# Altium PCB PCB2.PcbDoc (part 2 of 2)
Units mm, origin at the board's own origin, x right, y up, seen from the top; angles counter-clockwise.
Board outline 152.4 x 101.6 mm, 2 copper layers (Top Layer, Bottom Layer); 137 components, 157 nets, 564 pads, 402 vias.
Unrouted connection lines stored in the file: 6.
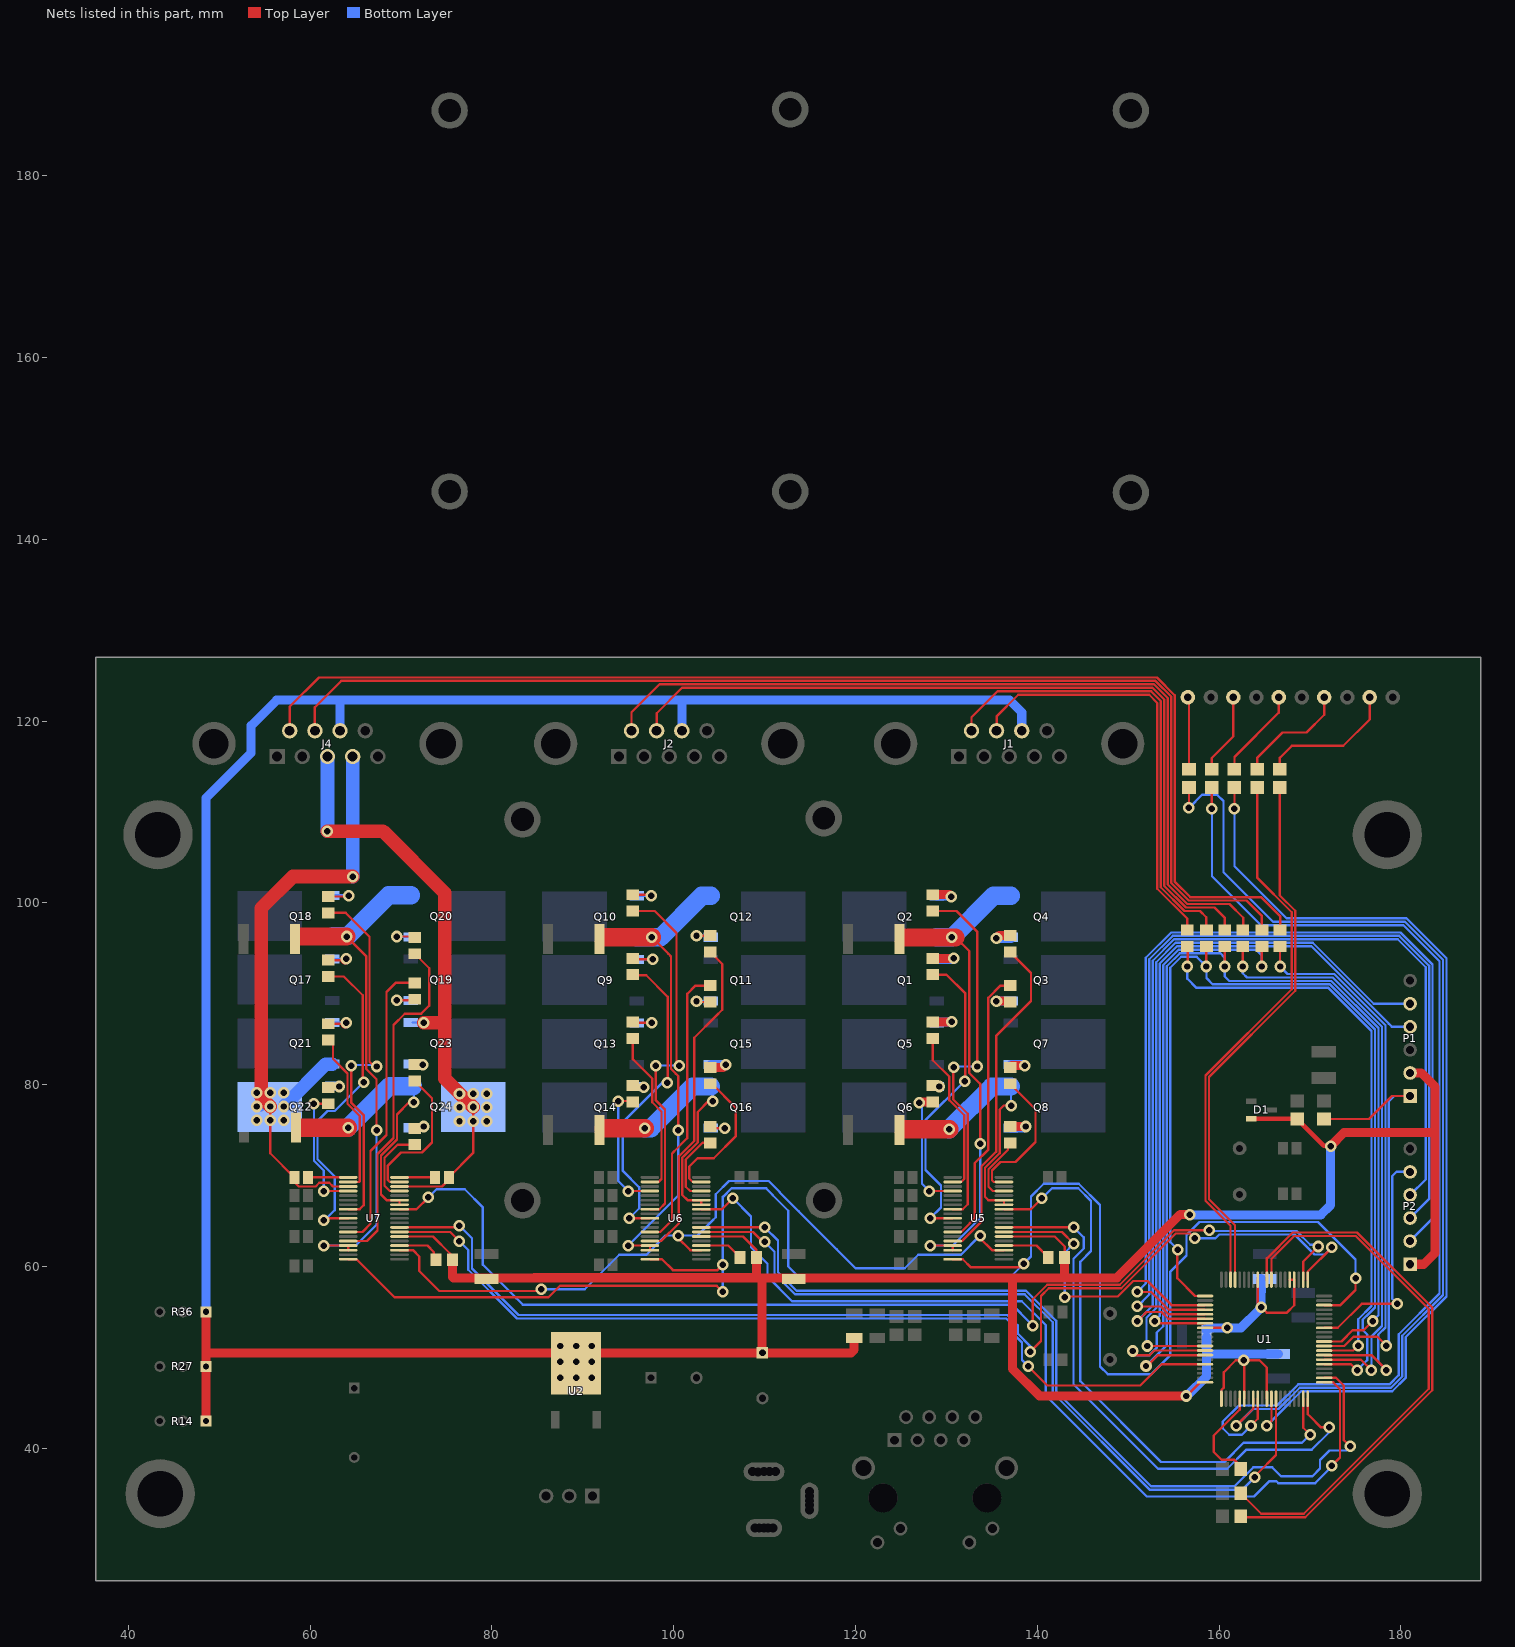
[diagram p2: the nets of this part, all layers, seen from the top]

## Via types
v1: diameter 1.27, hole 0.711, Top Layer to Bottom Layer, 402 vias

## Nets (pads, with @x,y where several pads share a name; then routed paths per layer and width w, separated by ;. In a path a pad name is that pad's centre, name@x,y a point inside that pad or via, vN(x,y) a via of type N, cw(c..) or ccw(c..) an arc to the next point about the centre after c; other vN are vias at no path point) (continued)
NetC41_1: C41.1 J4.4 Q21.3 Q22.4 U7.3 | length 70.6
  Top Layer w0.254: v1@55.6,77.4 55.6,72.45 C41.1@58.25,69.8 58.25,69.3 58.75,68.8 60.6,68.8 61,69.2 62.1,69.2 62.5,68.8 U7.3@64.175,68.8
  Top Layer w1.5: v1(55.6,77.6) 54.6,78.6 54.6,91.9 54.6,99.4 58.1,102.9 v1(64.7,102.9)
  Bottom Layer w1: Q22.4@54.575,77.55 Q22.4@55.075,78.05 ; Q22.4@57.25,77.55 Q22.4@57.25,77.8
  Bottom Layer w1.5: Q22.4@57.25,77.8 61.715,82.265 Q21.3@62.425,82.265 ; v1@64.67,102.9 J4.4@64.67,116.1
  other v1: 54.1,76.1 55.6,76.1 57.1,76.1 54.1,77.6 55.6,77.6 57.1,77.6 54.1,79.1 55.6,79.1 57.1,79.1
NetC41_2: C41.2 U7.1 | length 4.4
  Top Layer w0.254: C41.2@59.75,69.8 U7.1@64.175,69.8
NetC42_1: C42.1 J4.3 Q23.3 Q24.4 U7.36 | length 69.3
  Top Layer w0.254: U7.36@69.825,68.8 74.5,68.8 C42.1@75.25,69.55 ; C42.1@75.25,69.8 77.925,72.475 v1@77.925,77.625
  Top Layer w1.5: v1(61.9,107.9) 68,107.9 74.8,101.1 74.8,84.5 ; v1(72.5,86.8) 74.8,86.8 74.8,80.675 v1(77.925,77.55)
  Bottom Layer w0.254: Q23.3@71.25,86.835 v1@72.5,86.835
  Bottom Layer w1.5: v1(61.9,107.9) J4.3@61.9,116.1
  other v1: 76.425,76 77.925,76 79.425,76 76.425,77.5 77.925,77.5 79.425,77.5 76.425,79 77.925,79 79.425,79
NetC42_2: C42.2 U7.38 | length 3.9
  Top Layer w0.254: U7.38@69.825,69.8 C42.2@73.75,69.8
NetD2_1: D2.1 R38.2 | length 7.8
  Top Layer w0.254: R38.2@156.675,114.7 D2.1@156.675,122.505
NetD3_1: D3.1 R39.2 | length 8.9
  Top Layer w0.254: R39.2@159.175,114.7 159.175,115.925 161.555,118.305 D3.1@161.555,122.625
NetD4_1: D4.1 R40.2 | length 9.9
  Top Layer w0.254: R40.2@161.675,114.7 161.675,116.05 166.555,120.93 D4.1@166.555,122.625
NetD5_1: D5.1 R41.2 | length 12.5
  Top Layer w0.254: R41.2@164.175,114.7 164.175,115.95 166.975,118.75 169.6,118.75 171.555,120.705 D5.1@171.555,122.625
NetD6_1: D6.1 R42.2 | length 15.3
  Top Layer w0.254: R42.2@166.675,114.7 166.675,115.95 168,117.275 173.65,117.275 176.555,120.18 D6.1@176.555,122.625
NetJ1_6: J1.6 R1.1 | length 52.3
  Top Layer w0.254: J1.6@132.745,118.94 132.745,120.42 135.606,123.281 152.514,123.281 153.576,122.219 153.576,101.713 156.178,99.111 157.889,99.111 158.574,98.426 R1.1@158.574,96.9
NetJ1_7: J1.7 R2.1 | length 46.5
  Top Layer w0.254: J1.7@135.515,118.94 135.515,120.515 137.9,122.9 152.295,122.9 153.195,122 153.195,101.555 156.5,98.25 R2.1@156.5,97.441
NetJ2_6: J2.6 R3.1 | length 94.6
  Top Layer w0.254: J2.6@95.345,118.94 95.345,120.97 98.418,124.043 152.829,124.043 154.338,122.535 154.338,102.029 156.493,99.873 161.127,99.873 162.638,98.362 R3.1@162.638,97
NetJ2_7: J2.7 R4.1 | length 89.4
  Top Layer w0.254: J2.7@98.115,118.94 98.115,120.865 100.912,123.662 152.672,123.662 153.957,122.377 153.957,101.871 156.336,99.492 159.5,99.492 160.6,98.392 R4.1@160.6,97
NetJ4_6: J4.6 R5.1 | length 137.4
  Top Layer w0.254: J4.6@57.745,118.94 57.745,121.595 60.955,124.805 153.145,124.805 155.1,122.85 155.1,102.345 156.809,100.635 164.615,100.635 166.702,98.548 R5.1@166.702,97
NetJ4_7: J4.7 R6.1 | length 132.2
  Top Layer w0.254: J4.7@60.515,118.94 60.515,121.515 63.424,124.424 152.987,124.424 154.719,122.693 154.719,102.187 156.651,100.254 162.996,100.254 164.7,98.55 R6.1@164.7,97
NetP1_1: P1.1 R8.1 U1.9 | length 48
  Top Layer w0.254: R8.1@171.528,76.216 176.491,76.216 179.025,78.75 P1.1@181,78.75 ; U1.9@171.55,51.25 173.75,51.25 174.775,52.275 176.1,52.275 177.425,52.275 178.032,51.668 178.4,51.668 v1(178.4,51.3)
  Bottom Layer w0.254: v1(178.4,51.3) 178.711,51.611 178.669,51.653 178.669,56.292 178.669,70.108 178.669,78.169 179.25,78.75 P1.1@181,78.75
NetP1_4: P1.4 U1.47 | length 77.5
  Top Layer w0.254: v1@153.15,54 v1(152.9,54) 153.15,53.75 U1.47@158.45,53.75
  Bottom Layer w0.254: v1(152.9,54) 153.457,54.557 153.457,93.323 155.36,95.226 170.143,95.226 178.649,86.72 178.999,86.37 P1.4@181,86.37
NetP1_5: P1.5 U1.52 | length 80.7
  Top Layer w0.254: v1(152.075,51.25) U1.52@158.45,51.25
  Bottom Layer w0.254: v1(152.075,51.25) 152,51.325 152,54.357 153.076,55.433 153.076,93.481 155.202,95.607 170.301,95.607 176.998,88.91 P1.5@181,88.91
NetP2_2: P2.2 U1.44 | length 111
  Top Layer w0.254: v1(151,57.2) 152.525,57.2 154.475,55.25 U1.44@158.45,55.25
  Bottom Layer w0.254: v1(151,57.2) 151.933,58.133 151.933,93.955 154.728,96.75 179.959,96.75 183.476,93.233 183.476,65.266 P2.2@181,62.79
NetP2_3: P2.3 U1.45 | length 108.4
  Top Layer w0.254: v1(151,55.6) 153.586,55.6 154.436,54.75 U1.45@158.45,54.75
  Bottom Layer w0.254: v1(151,55.6) 152.314,56.914 152.314,93.797 154.886,96.369 179.801,96.369 183.095,93.075 183.095,67.425 P2.3@181,65.33
NetP2_4: P2.4 U1.46 | length 107.6
  Top Layer w0.254: v1(151,54) 151,54.5 151.425,54.075 151.425,54.425 152,55 153.647,55 154.397,54.25 U1.46@158.45,54.25
  Bottom Layer w0.254: v1@150.95,54.05 v1@151.154,54.05 ; v1(151,54) 152.695,55.695 152.695,93.639 155.044,95.988 179.643,95.988 182.714,92.917 182.714,69.584 P2.4@181,67.87
NetP2_5: P2.5 U1.13 | length 25.6
  Top Layer w0.254: U1.13@171.55,53.25 173.05,53.25 175.7,55.9 v1(179.6,55.9)
  Bottom Layer w0.254: v1(179.6,55.9) 179.05,56.45 179.05,69.95 179.51,70.41 P2.5@181,70.41
NetQ1_1: Q1.1 R15.1 | length 3.8
  Top Layer w1: R15.1@128.5,93.9 v1@130.5,93.9
  Bottom Layer w1: Q1.1@128.925,93.785 v1@130.685,93.785
  other v1: 130.8,93.9
NetQ2_1: Q2.1 R16.1 | length 3.3
  Top Layer w1: R16.1@128.5,100.9 v1@130.3,100.9
  Bottom Layer w1: Q2.1@128.925,100.785 v1@130.415,100.785
  other v1: 130.5,100.7
NetQ2_3: Q2.3 Q4.3 R51.1 U5.16 U5.17 | length 57.2
  Top Layer w0.254: v1(128.2,62.3) U5.16@130.675,62.3 U5.17@130.675,61.8 ; v1@130.992,96.2 132.5,94.692 132.5,81.3 133.7,80.1 v1(133.7,73.5)
  Top Layer w2: 125.55,96.2 v1@130.992,96.2
  Bottom Layer w0.254: v1(128.2,62.3) 130.7,62.3 133.7,65.3 v1(133.7,73.5)
  Bottom Layer w2: Q2.3@128.925,96.215 130.615,96.215 135.185,100.785 Q4.3@137.075,100.785
  other v1: 130.6,96.2
NetQ3_1: Q3.1 R22.1 | length 3
  Top Layer w1: v1(135.5,89.2) R22.1@136.9,89.2
  Bottom Layer w1: v1@135.515,89.215 Q3.1@137.075,89.215
NetQ4_1: Q4.1 R23.1 | length 2.8
  Top Layer w1: v1@135.8,96.4 R23.1@137,96.4
  Bottom Layer w1: v1(135.5,96.1) Q4.1@137.075,96.1
NetQ5_1: Q5.1 R24.1 | length 3.7
  Top Layer w1: R24.1@128.5,86.9 v1(130.6,86.9)
  Bottom Layer w1: Q5.1@129.04,86.9 v1(130.6,86.9)
NetQ6_1: Q6.1 R25.1 | length 0.9
  Top Layer w1: R25.1@128.6,79.8 v1(129.2,79.8)
  Bottom Layer w1: Q6.1@128.925,79.785 Q6.1@129.2,79.785
NetQ6_3: Q6.3 Q8.3 R52.1 U5.32 U5.33 | length 30.1
  Top Layer w0.254: U5.32@136.325,66.8 U5.33@136.325,67.3 134.6,67.3 134.24,67.66 134.24,68.686 134.24,70.862 135.843,72.465 135.843,77.243 136.3,77.7 v1(137.1,77.7)
  Top Layer w2: 125.4,75.1 v1(130.3,75.1)
  Bottom Layer w0.254: v1(137.1,77.7) Q8.3@137.1,79.76
  Bottom Layer w2: v1(130.3,75.1) 134.985,79.785 Q8.3@137.075,79.785
NetQ7_1: Q7.1 R26.1 | length 2.8
  Top Layer w1: R26.1@137.2,82.1 v1(138.6,82.1)
  Bottom Layer w1: Q7.1@137.075,82.215 v1@138.485,82.215
NetQ8_1: Q8.1 R28.1 | length 3.1
  Top Layer w1: R28.1@137,75.4 v1(138.7,75.4)
  Bottom Layer w1: Q8.1@137.075,75.215 v1@138.515,75.215
NetQ9_1: Q9.1 R29.1 | length 3.9
  Top Layer w0.254: R29.1@95.6,93.8 v1(97.7,93.8)
  Bottom Layer w0.254: Q9.1@95.925,93.785 v1@97.685,93.785
NetQ10_1: Q10.1 R30.1 | length 3.5
  Top Layer w0.254: R30.1@95.5,100.9 v1@97.4,100.9
  Bottom Layer w0.254: Q10.1@95.94,100.8 v1(97.5,100.8)
NetQ10_3: Q10.3 Q12.3 R53.1 U6.16 U6.17 | length 55.8
  Top Layer w0.254: v1(95,62.3) U6.16@97.375,62.3 U6.17@97.375,61.8 ; v1@97.6,96.104 97.711,96.104 v1(97.6,96.215) 98.1,95.715 99.396,94.419 99.7,94.115 99.7,81.743 100.232,81.211 100.5,80.943 v1(100.5,75)
  Top Layer w2: 92.4,96.215 v1(97.6,96.215)
  Bottom Layer w0.254: v1(95,62.3) 100.5,67.8 v1(100.5,75)
  Bottom Layer w2: Q10.3@95.925,96.215 98.515,96.215 103.085,100.785 Q12.3@104.075,100.785
NetQ11_1: Q11.1 R31.1 | length 3
  Top Layer w0.254: v1@102.6,89.1 R31.1@104,89.1
  Bottom Layer w0.254: v1@102.515,89.215 Q11.1@104.075,89.215
  other v1: 102.5,89.2
NetQ12_1: Q12.1 R32.1 | length 2.9
  Top Layer w0.254: v1(102.5,96.4) R32.1@104,96.4
  Bottom Layer w0.254: v1(102.5,96.4) Q12.1@103.89,96.4
NetQ13_1: Q13.1 R33.1 | length 3.7
  Top Layer w0.254: R33.1@95.6,86.8 v1(97.6,86.8)
  Bottom Layer w0.254: Q13.1@95.925,86.785 v1@97.585,86.785
NetQ14_1: Q14.1 R34.1 | length 1.7
  Top Layer w0.254: R34.1@95.7,79.7 v1(96.7,79.7)
  Bottom Layer w0.254: Q14.1@96.01,79.7 v1(96.7,79.7)
NetQ14_3: Q14.3 Q16.3 R54.1 U6.32 U6.33 | length 30.2
  Top Layer w0.254: U6.32@103.025,66.8 U6.33@103.025,67.3 101.5,67.3 100.94,67.86 100.94,68.621 100.94,71.958 101.081,72.099 102.632,73.65 102.632,77 103.832,78.2 v1(104.3,78.2)
  Top Layer w2: R54.1@92.3,75.2 v1(96.8,75.2)
  Bottom Layer w0.254: Q16.3@104.075,79.785 104.3,79.56 v1(104.3,78.2)
  Bottom Layer w2: v1@96.8,75.215 97.485,75.215 102.055,79.785 Q16.3@104.075,79.785
NetQ15_1: Q15.1 R35.1 | length 3
  Top Layer w1: R35.1@104,81.9 v1@105.4,81.9
  Bottom Layer w1: Q15.1@104.075,82.215 v1@105.685,82.215
  other v1: 105.7,82.2
NetQ16_1: Q16.1 R37.1 | length 2.9
  Top Layer w0.254: R37.1@104.2,75.2 v1(105.6,75.2)
  Bottom Layer w0.254: Q16.1@104.09,75.2 v1(105.6,75.2)
NetQ17_1: Q17.1 R43.1 | length 3.6
  Top Layer w0.254: R43.1@62,93.7 v1@63.83,93.7
  Top Layer w1: v1@63.83,93.7 v1(63.965,93.835)
  Bottom Layer w0.254: Q17.1@62.425,93.835 v1(63.965,93.835)
NetQ18_1: Q18.1 R44.1 | length 3.9
  Top Layer w0.254: R44.1@62,100.7 v1@64.15,100.7
  Bottom Layer w0.254: Q18.1@62.425,100.835 v1@64.215,100.835
  other v1: 64.25,100.8
NetQ18_3: Q18.3 Q20.3 R55.1 U7.16 U7.17 | length 58.8
  Top Layer w0.254: v1(61.5,62.3) U7.16@64.175,62.3 U7.17@64.175,61.8 ; v1(64,96.3) 66.151,94.149 66.151,81.749 67.3,80.6 v1@67.3,74.976
  Top Layer w2: R55.1@58.8,96.3 v1(64,96.3)
  Bottom Layer w0.254: v1(61.5,62.3) 65,62.3 67.3,64.6 v1(67.3,75)
  Bottom Layer w1: Q18.3@62.425,96.265 Q18.3@62.512,96.352
  Bottom Layer w2: Q18.3@62.512,96.352 63.802,96.352 64.152,96.352 68.635,100.835 Q20.3@71.075,100.835
NetQ19_1: Q19.1 R45.1 | length 3.4
  Top Layer w0.254: v1(69.5,89.3) R45.1@71.4,89.3
  Top Layer w1: v1@69.5,89.296 v1(69.5,89.3) v1@69.5,89.296
  Bottom Layer w0.254: v1@69.535,89.265 Q19.1@71.075,89.265
NetQ20_1: Q20.1 R46.1 | length 3
  Top Layer w0.254: v1(69.5,96.3) R46.1@70.9,96.3
  Bottom Layer w0.254: v1@69.5,96.265 Q20.1@71.075,96.265
  Bottom Layer w1: v1@69.5,96.265 v1(69.5,96.3)
NetQ21_1: Q21.1 R47.1 | length 3.6
  Top Layer w0.254: R47.1@62,86.7 v1@63.83,86.7
  Top Layer w1: v1@63.83,86.7 v1(63.965,86.835)
  Bottom Layer w0.254: Q21.1@62.425,86.835 v1(63.965,86.835)
NetQ22_1: Q22.1 R48.1 | length 1.2
  Top Layer w0.254: R48.1@61.7,79.8 R48.1@62.18,79.8
  Bottom Layer w0.254: Q22.1@61.7,79.8 Q22.1@62.39,79.8
  other v1: 63.2,79.8
NetQ22_3: Q22.3 Q24.3 R56.1 U7.32 U7.33 | length 32.2
  Top Layer w0.254: U7.32@69.825,66.8 U7.33@69.825,67.3 68.4,67.3 67.784,67.916 67.784,72.218 69.543,73.977 69.543,76.727 70.9,78.084 v1(71.416,78.084)
  Top Layer w2: R56.1@58.9,75.265 v1(64.165,75.265)
  Bottom Layer w0.254: v1(71.416,78.084) Q24.3@71.416,79.494
  Bottom Layer w1.5: Q22.3@62.425,75.265 v1(64.165,75.265)
  Bottom Layer w2: v1(64.165,75.265) 68.735,79.835 Q24.3@71.3,79.835
NetQ23_1: Q23.1 R49.1 | length 2.3
  Top Layer w0.254: R49.1@71.435,82.265 71.435,82.25 71.485,82.2 v1(72.4,82.2)
  Bottom Layer w0.254: Q23.1@71.095,82.2 v1(72.4,82.2)
NetQ24_1: Q24.1 R50.1 | length 1.3
  Bottom Layer w0.254: Q24.1@71.155,75.4 v1(72.5,75.4)
NetR9_1: R9.1 U1.30 | length 61.1
  Top Layer w0.254: R9.1@162.368,32.512 162.461,32.419 169.458,32.419 183.432,46.393 183.432,55.48 175.174,63.738 168.099,63.738 165.25,60.889 U1.30@165.25,58.55
NetR10_1: R10.1 U1.29 | length 60.1
  Top Layer w0.254: R10.1@162.368,35.052 164.62,32.8 169.3,32.8 183.051,46.551 183.051,55.323 175.017,63.357 168.257,63.357 165.75,60.85 U1.29@165.75,58.55
NetR11_1: R11.1 U5.23 | length 5.4
  Top Layer w0.254: U5.23@136.325,62.3 139.9,62.3 R11.1@141.2,61
NetR12_1: R12.1 U6.23 | length 4.8
  Top Layer w0.254: U6.23@103.025,62.3 106,62.3 R12.1@107.3,61
NetR13_1: R13.1 U7.23 | length 5.1
  Top Layer w0.254: U7.23@69.825,62.3 72.9,62.3 73.6,61.6 R13.1@73.6,60.55
NetR15_2: R15.2 U5.10 | length 34.7
  Top Layer w0.254: v1(128.2,65.3) U5.10@130.675,65.3 ; R15.2@128.5,92.1 130,92.1 132.081,90.019 132.081,80.481 v1(132,80.4)
  Bottom Layer w0.254: v1(128.2,65.3) 129.4,66.5 129.4,68.9 127.7,70.6 127.7,76.1 v1(132,80.4)
NetR16_2: R16.2 U5.8 | length 41
  Top Layer w0.254: R16.2@128.5,99.1 131.1,99.1 133.4,96.8 v1(133.4,82) ; U5.8@130.675,66.3 131.8,66.3 132.335,66.835 132.335,69.475 132.335,76.804 130.73,78.409 130.73,81.83 v1(130.8,81.9)
  Bottom Layer w0.254: v1(130.8,81.9) 130.8,81.934 130.866,82 v1(133.4,82)
NetR21_2: R21.2 U1.65 | length 10.4
  Top Layer w0.254: R21.2@162.225,38.175 161.975,38.425 161.677,38.723 160.277,38.723 159.411,39.589 159.411,41.405 162.25,44.244 U1.65@162.25,45.45
NetR22_2: R22.2 U5.13 | length 30.9
  Top Layer w0.254: U5.13@130.675,63.8 131.621,63.8 131.954,64.133 133.097,65.276 133.097,66.519 133.097,69.159 133.097,71.36 134.611,72.874 134.611,88.832 134.611,89.568 135.943,90.9 R22.2@137,90.9
NetR23_2: R23.2 U5.15 | length 36.9
  Top Layer w0.254: U5.15@130.675,62.8 131.699,62.8 133.859,64.96 133.859,71.02 135.462,72.623 135.462,85.362 139.3,89.2 139.3,92.3 R23.2@137,94.6
NetR24_2: R24.2 U5.2 | length 18.3
  Top Layer w0.254: R24.2@128.5,85.1 128.5,82.7 130.3,80.9 130.3,78.3 131.954,76.646 131.954,69.633 131.621,69.3 U5.2@130.675,69.3
NetR25_2: R25.2 U5.4 | length 14.1
  Top Layer w0.254: v1(128.1,68.3) U5.4@130.675,68.3
  Top Layer w1: v1@127.1,78.1 R25.2@128.5,78.1
  Bottom Layer w0.254: v1(127,78) 127.3,77.7 127.3,69.1 v1(128.1,68.3)
NetR26_2: R26.2 U5.37 | length 16.1
  Top Layer w0.254: U5.37@136.325,69.3 135.2,69.3 135.002,69.498 135.002,70.547 135.955,71.5 137.6,71.5 139.8,73.7 139.8,77.3 R26.2@137,80.1
NetR28_2: R28.2 U5.35 | length 7.7
  Top Layer w0.254: U5.35@136.325,68.3 135.1,68.3 134.621,68.779 134.621,70.705 136.758,72.842 136.758,73.181 137,73.422 R28.2@137,73.6
NetR29_2: R29.2 U6.10 | length 35
  Top Layer w0.254: v1(95.1,65.3) U6.10@97.375,65.3 ; R29.2@95.562,92.038 96.962,92.038 99.319,89.681 99.319,81.742 99.319,80.381 99.4,80.3 v1(99.3,80.2)
  Bottom Layer w0.254: v1(95.1,65.3) 96.2,66.4 96.2,68.7 94.4,70.5 94.4,75.9 98.7,80.2 99.137,80.2 v1(99.3,80.2)
NetR30_2: R30.2 U6.8 | length 40.5
  Top Layer w0.254: R30.2@95.5,99.1 97.9,99.1 100.3,96.7 v1@100.3,82.1 ; U6.8@97.375,66.3 98.4,66.3 99.035,66.935 99.035,67.071 99.035,67.832 99.035,72.706 99.035,77.265 98,78.3 v1(98,82.1)
  Bottom Layer w0.254: v1(98,82.1) v1(100.6,82.1)
NetR31_2: R31.2 U6.13 | length 31.5
  Top Layer w0.254: U6.13@97.375,63.8 98.522,63.8 99.797,65.075 99.797,68.148 99.797,72.39 99.797,72.432 99.938,72.573 100.043,72.678 101.489,74.124 101.489,89.989 102.4,90.9 R31.2@104,90.9
NetR32_2: R32.2 U6.15 | length 36.4
  Top Layer w0.254: U6.15@97.375,62.8 98.6,62.8 100.559,64.759 100.559,67.702 100.559,68.463 100.559,72.075 100.559,72.116 100.7,72.257 102.251,73.808 102.251,85.153 104.598,87.5 105.335,88.237 105.335,93.265 R32.2@104,94.6
NetR33_2: R33.2 U6.2 | length 18.7
  Top Layer w0.254: R33.2@95.5,85.1 95.5,83 95.5,82.8 97.619,80.681 97.619,78.057 98.654,77.022 98.654,72.864 98.654,69.633 U6.2@98.321,69.3 ; U6.2@97.375,69.3 U6.2@98.321,69.3 ; U6.2@97.775,69.3 U6.2@98.321,69.3
NetR34_2: R34.2 U6.4 | length 14.2
  Top Layer w0.254: v1(93.9,78.2) R34.2@95.4,78.2 ; v1(95,68.3) U6.4@97.375,68.3
  Bottom Layer w0.254: v1(93.9,78.2) 93.9,69.4 v1(95,68.3)
NetR35_2: R35.2 U6.37 | length 16.3
  Top Layer w0.254: U6.37@103.025,69.3 102.079,69.3 101.702,69.677 101.702,71 102.602,71.9 104.4,71.9 106.8,74.3 106.8,77.5 104.2,80.1 R35.2@104,80.1
NetR37_2: R37.2 U6.35 | length 8.3
  Top Layer w0.254: U6.35@103.025,68.3 101.8,68.3 101.321,68.779 101.321,71.759 103.162,73.6 R37.2@104,73.6
NetR38_1: R38.1 U1.68 | length 114.8
  Top Layer w0.254: v1(156.675,110.45) R38.1@156.675,112.7 ; v1(161.9,42.5) 163.75,44.35 U1.68@163.75,45.45
  Bottom Layer w0.254: v1(156.675,110.45) 158.125,111.9 159.775,111.9 160.475,111.2 160.475,103.375 165.931,97.919 180.442,97.919 184.619,93.742 184.619,58.955 184.619,56.867 180.13,52.378 180.13,47.891 178.889,46.65 173.835,46.65 168.861,46.65 166.531,44.32 163.72,44.32 v1(161.9,42.5)
NetR39_1: R39.1 U1.69 | length 115.4
  Top Layer w0.254: v1(159.175,110.375) R39.1@159.175,112.7 ; v1(163.5,42.5) 164.25,43.25 U1.69@164.25,45.45 U1.69@164.236,45.436
  Bottom Layer w0.254: v1@159.025,110.375 159.2,110.2 159.2,102.934 164.596,97.538 180.284,97.538 184.238,93.584 184.238,57.024 179.749,52.535 179.749,48.049 178.731,47.031 173.993,47.031 168.703,47.031 166.373,44.701 163.562,44.701 162.168,44.701 160.4,42.933 160.4,42.2 161.1,41.5 162.5,41.5 v1(163.5,42.5)
NetR40_1: R40.1 U1.72 | length 105.1
  Top Layer w0.254: v1(161.675,110.375) R40.1@161.675,112.7 ; v1(165.25,42.5) 165.75,43 U1.72@165.75,45.45
  Bottom Layer w0.254: v1(161.675,110.375) 161.675,104.025 167.4,98.3 180.6,98.3 185,93.9 185,58.797 185,56.709 180.511,52.22 180.511,47.733 179.047,46.269 173.677,46.269 169.019,46.269 166.689,43.939 v1(165.25,42.5) v1@165,42.5
NetR41_1: R41.1 U1.38 | length 60.8
  Top Layer w0.254: U1.38@161.25,58.55 161.25,64.489 158.501,67.238 158.501,74.12 158.501,81.001 167.988,90.488 167.988,98.973 164.175,102.786 R41.1@164.175,112.7
NetR42_1: R42.1 U1.37 | length 60
  Top Layer w0.254: U1.37@161.75,58.55 161.75,64.528 158.882,67.396 158.882,80.843 168.369,90.33 168.369,99.131 166.675,100.825 R42.1@166.675,112.7
NetR43_2: R43.2 U7.10 | length 35.8
  Top Layer w0.254: v1@61.7,65.3 U7.10@64.175,65.3 ; R43.2@62,91.9 63.7,91.9 65.77,89.83 65.77,80.392 v1(65.881,80.281)
  Bottom Layer w0.254: v1@61.55,65.05 62.7,66.2 62.7,67.5 62.7,69.9 60.8,71.8 60.8,76 61.9,77.1 62.7,77.1 v1(65.881,80.281)
  other v1: 61.5,65.1
NetR44_2: R44.2 U7.8 | length 40.4
  Top Layer w0.254: R44.2@62,98.9 63.9,98.9 66.532,96.268 66.532,82.518 66.746,82.304 67.05,82 v1(67.3,82) ; U7.8@64.175,66.3 65.437,66.3 65.879,66.741 65.879,72.499 65.879,75.713 65.879,76.66 64.5,78.039 v1@64.5,81.55
  Bottom Layer w0.254: v1@64.575,82.175 67.125,82.175 v1(67.3,82)
  other v1: 64.5,82.1
NetR45_2: R45.2 U7.13 | length 32.6
  Top Layer w0.254: U7.13@64.175,63.8 65.75,63.8 66.641,64.691 66.641,72.691 68.181,74.231 68.4,74.45 68.4,90.2 69.4,91.2 R45.2@71.5,91.2
NetR46_2: R46.2 U7.15 | length 38.2
  Top Layer w0.254: U7.15@64.175,62.8 66.25,62.8 67.403,63.953 67.403,72.375 69.162,74.134 69.162,86.562 70.404,87.804 72.204,87.804 73.1,88.7 73.1,92.8 R46.2@71.5,94.4
NetR47_2: R47.2 U7.2 | length 18.3
  Top Layer w0.254: R47.2@62,84.9 62.5,84.4 62.5,82.843 64.1,81.243 64.1,77.9 65.454,76.546 65.454,69.356 65.398,69.3 U7.2@64.175,69.3
NetR48_2: R48.2 U7.4 | length 14.3
  Top Layer w0.254: v1(60.4,77.9) R48.2@62,77.9 ; v1(61.5,68.3) U7.4@64.175,68.3
  Bottom Layer w0.254: v1(60.4,77.9) 60.419,77.881 60.419,71.642 61.5,70.561 v1(61.5,68.3)
NetR49_2: R49.2 U7.37 | length 16.4
  Top Layer w0.254: U7.37@69.825,69.3 68.762,69.3 68.546,69.516 68.546,71.096 69.996,72.546 72.305,72.546 73.4,73.641 73.4,78.5 R49.2@71.5,80.4
NetR50_2: R50.2 U7.35 | length 8.4
  Top Layer w0.254: U7.35@69.825,68.3 68.75,68.3 68.165,68.885 68.165,71.965 69.6,73.4 R50.2@71,73.4
NetU1_1: U1.1 U6.31 | length 104.6
  Top Layer w0.254: U6.31@103.025,66.3 105.3,66.3 v1(106.5,67.5) ; U1.1@172.35,47.25 U1.1@171.55,47.25 172.55,47.25 173.3,46.5 173.3,39 v1(172.4,38.1)
  Bottom Layer w0.254: v1(106.5,67.5) 108.5,65.5 108.5,62.112 110.302,60.31 110.302,58.904 113.02,56.186 138.281,56.186 140.92,53.547 140.92,45.792 152.022,34.69 163.826,34.69 165.525,36.389 166.268,36.389 166.489,36.168 170.568,36.168 v1@172.45,38.05 ; v1@172.4,37.6 v1(172.4,38.1)
NetU1_2: U1.2 U6.27 | length 102.4
  Top Layer w0.254: U6.27@103.025,64.3 v1(110,64.3) ; U1.2@171.55,47.75 172.85,47.75 173.7,46.9 173.7,40.9 v1(174.4,40.2)
  Bottom Layer w0.254: v1(110,64.3) 111.457,62.843 111.457,59.365 113.493,57.329 138.755,57.329 142.063,54.021 142.063,46.265 152.495,35.833 161.676,35.833 163.743,37.9 165.835,37.9 166.805,36.93 170.252,36.93 171.1,37.778 171.1,38.707 172.147,39.755 173.955,39.755 v1(174.4,40.2)
NetU1_21: U1.21 U7.27 | length 125.9
  Top Layer w0.254: U7.27@69.825,64.3 74,64.3 76.2,64.3 v1(76.4,64.5) ; v1(139.2,50.6) 140.4,51.8 140.4,56.761 141.254,57.615 149.22,57.615 155.224,63.619 156.781,63.619 v1(157.3,63.1) ; U1.21@169.75,58.55 169.75,59.45 v1(172.4,62.1)
  Bottom Layer w0.254: v1(76.4,64.5) 76.8,64.1 77.8,63.1 77.8,59.784 82.207,55.376 82.922,54.662 85.139,54.662 90.339,54.662 136.722,54.662 137.849,53.535 137.849,52.612 139.2,51.261 v1(139.2,50.6) ; v1(157.3,63.1) 159.6,63.1 160.014,63.514 168.286,63.514 170.489,61.311 171.611,61.311 v1(172.4,62.1)
NetU1_22: U1.22 U7.31 | length 123.6
  Top Layer w0.254: U7.31@69.825,66.3 71.7,66.3 v1(73,67.6) ; v1(139.5,53.5) 139.5,54.6 139.5,56.4 141.096,57.996 149.062,57.996 155.066,64 v1(158.9,64) ; U1.22@169.25,58.55 169.25,60.55 v1(170.9,62.2)
  Bottom Layer w0.254: v1(73,67.6) 73.9,68.5 77,68.5 79,66.5 79,65.739 79,64.678 79,64.046 79,61.862 79,60.2 82.681,56.519 83.395,55.805 84.665,55.805 89.865,55.805 137.195,55.805 139.181,53.819 139.5,53.819 v1(139.5,53.5) ; v1(158.9,64) 159.005,63.895 168.505,63.895 170.009,62.391 170.709,62.391 171.091,62.391 v1(170.9,62.2)
NetU1_79: U1.79 U5.31 | length 65.9
  Top Layer w0.254: U5.31@136.325,66.3 139.3,66.3 v1(140.5,67.5) ; U1.79@169.25,45.45 169.25,42.25 v1(170,41.5)
  Bottom Layer w0.254: v1(140.5,67.5) 141.6,68.6 144.5,68.6 145.9,67.2 145.9,61.7 144.73,60.53 144.73,47.37 153.6,38.5 160.571,38.5 162.684,40.613 169.113,40.613 v1(170,41.5)
NetU1_80: U1.80 U5.27 | length 64.7
  Top Layer w0.254: U5.27@136.325,64.3 v1(144,64.3) ; U1.80@169.75,45.45 169.75,43.75 169.9,43.6 171.2,42.3 v1(172.1,42.3)
  Bottom Layer w0.254: v1(144,64.3) 145.1,63.2 145.1,61.978 143.968,60.846 143.968,47.054 153.284,37.738 160.887,37.738 163,39.851 170.19,39.851 172.1,41.761 v1(172.1,42.3)
NetU5_22: U5.22 U6.22 U7.22 | length 85.4
  Top Layer w0.254: U7.22@69.825,61.8 71.3,61.8 72,61.1 72,59.5 74.2,57.3 85,57.3 85.2,57.5 v1(85.4,57.5) ; v1@100.4,63.2 101.8,61.8 U6.22@103.025,61.8 ; v1@133.7,63.1 135,61.8 U5.22@136.325,61.8
  Bottom Layer w0.254: v1@85.2,57.5 v1(85.4,57.5) 90.2,57.5 92.9,60.2 94,61.3 97,61.3 99.1,63.4 100.2,63.4 100.4,63.2 100.6,63.4 102.6,63.4 104.2,65 104.622,65.422 104.622,67.957 106.065,69.4 110.435,69.4 111.651,68.184 111.651,68.149 113.738,66.062 117.913,61.887 120,59.8 125.4,59.8 126.9,61.3 128.661,61.3 131.6,61.3 v1(133.7,63.4)
  other v1: 100.5,63.4
NULL_ALFA: R2.2 U1.8 | length 65.3
  Top Layer w0.254: v1@156.542,93.042 R2.2@156.542,95.2 ; U1.8@171.55,50.75 174.75,50.75 v1(175.3,51.3)
  Bottom Layer w0.254: v1(156.5,93) 156.5,91.65 157.499,90.651 172.024,90.651 176.764,85.911 176.764,55.66 175.3,54.196 v1(175.3,51.3)
NULL_DELTA: R4.2 U1.10 U1.54 | length 122.5
  Top Layer w0.254: v1(151.95,49.05) 152.1,48.9 152.4,48.9 152.4,49.385 153.265,50.25 U1.54@158.45,50.25 ; v1(160.6,93) R4.2@160.6,95.2 ; U1.10@171.55,51.75 173.45,51.75 174.7,53 175.9,53 v1(176.9,54)
  Bottom Layer w0.254: v1@152.4,49.111 152.4,48.9 152.1,48.9 v1(151.95,49.05) 154.219,51.319 154.219,59.558 154.238,59.577 154.238,93.027 155.675,94.464 160.136,94.464 160.6,94 v1(160.6,93) 160.6,91.925 161.112,91.413 172.34,91.413 177.526,86.227 177.526,78.642 177.526,70.581 177.526,54.626 v1(176.9,54)
NULL_FOCUS: R6.2 U1.53 | length 69.9
  Top Layer w0.254: v1(150.5,50.7) 150.5,50.25 152.35,50.25 152.85,50.75 U1.53@158.45,50.75 ; v1(164.7,93) R6.2@164.7,95.2
  Bottom Layer w0.254: v1@150.5,50.25 v1(150.5,50.7) 151,50.2 152.282,50.2 153.118,51.036 153.118,52.7 153.838,53.42 153.838,93.166 155.517,94.845 164.055,94.845 164.7,94.2 v1(164.7,93)
POS_ALFA: R1.2 U1.5 U1.41 | length 110.8
  Top Layer w0.254: v1@155.6,61.836 155.4,61.636 155.4,58.7 157.35,56.75 U1.41@158.45,56.75 ; v1@158.574,93.026 R1.2@158.574,95.25 ; U1.5@171.55,49.25 174.5,49.25 v1(175.175,48.575)
  Bottom Layer w0.254: v1(155.464,61.836) 154.619,62.681 154.619,92.869 155.833,94.083 157.517,94.083 v1(158.6,93) 158.6,91.725 159.293,91.032 172.182,91.032 177.145,86.069 177.145,78.8 177.145,70.739 177.145,55.502 176.532,54.889 175.8,54.157 175.8,53.025 176.3,52.525 176.3,49.7 v1(175.175,48.575) v1@174.925,48.825
POS_DELTA: R3.2 U1.6 | length 64.6
  Top Layer w0.254: v1(162.6,93) R3.2@162.6,95.2 ; U1.6@171.55,49.75 175.6,49.75 v1(176.75,48.6)
  Bottom Layer w0.254: v1(162.6,93) 162.6,92.25 163.056,91.794 172.497,91.794 177.907,86.384 177.907,78.485 177.907,70.423 177.907,53.446 176.75,52.289 v1(176.75,48.6)
POSFOCUS: R5.2 U1.7 | length 62.6
  Top Layer w0.254: v1(166.7,93) R5.2@166.7,95.2 ; U1.7@171.55,50.25 176.75,50.25 v1(178.4,48.6)
  Bottom Layer w0.254: v1(166.7,93) 167.525,92.175 172.655,92.175 178.288,86.542 178.288,78.327 178.288,70.266 178.288,56.134 178.288,53.288 177.511,52.511 177.511,50.932 177.511,49.489 v1(178.4,48.6)
RESET: U1.18 U5.19 U6.19 U7.19 | length 200
  Top Layer w0.254: U7.19@64.175,60.8 65.1,60.8 69.289,56.611 70.389,56.611 84.53,56.611 84.832,56.611 85.768,56.611 86.211,56.611 87.489,57.889 104.711,57.889 v1(105.4,57.2) ; U6.19@97.375,60.8 98.7,60.8 99.9,59.6 104.8,59.6 v1(105.4,60.2) ; v1(138.5,60.3) 138.1,59.9 132.7,59.9 131.8,60.8 ; U1.18@171.55,55.75 173.35,55.75 175,57.4 v1(175,58.7) ; 131.8,60.8 U5.19@130.675,60.8 131.8,60.8
  Bottom Layer w0.254: v1(105.4,57.2) v1(105.4,60.2) 105.4,67.657 106.343,68.6 110.157,68.6 110.889,67.868 110.889,67.833 112.6,66.122 112.6,60 113.562,59.038 119.684,59.038 137.238,59.038 v1(138.5,60.3) 139.3,61.1 139.3,67.7 140.7,69.1 144.55,69.1 146.889,66.761 146.889,49.011 147.739,48.161 152.561,48.161 154.6,50.2 154.6,59.4 156.411,61.211 156.411,63.468 157.832,64.889 170.868,64.889 175,60.757 v1(175,58.7)
STEPALFA: U1.43 U5.26 | length 31.7
  Top Layer w0.254: U5.26@136.325,63.8 142.7,63.8 v1(144,62.5) ; v1@143.1,56.7 148.844,56.7 150.544,58.4 152.1,58.4 154.75,55.75 U1.43@158.45,55.75
  Bottom Layer w0.254: v1(143,56.6) 143,61.5 143.5,62 v1(144,62.5)
STEPDELTA: U1.73 U6.26 | length 89
  Top Layer w0.254: U6.26@103.025,63.8 108.7,63.8 109.8,62.7 v1(110,62.7) ; v1(163.9,36.8) 163.9,37.25 164.25,37.25 166.25,39.25 U1.73@166.25,45.45
  Bottom Layer w0.254: v1(110,62.7) 111.076,61.624 111.076,59.208 113.336,56.948 138.597,56.948 141.682,53.863 141.682,46.107 152.337,35.452 162.552,35.452 v1(163.9,36.8) v1@163.85,36.85
STEPFOCUS: U1.56 U7.26 | length 99.5
  Top Layer w0.254: U7.26@69.825,63.8 75.4,63.8 v1(76.4,62.8) ; v1(139,49) 141.094,46.906 151.306,46.906 153.65,49.25 U1.56@158.45,49.25
  Bottom Layer w0.254: v1(76.4,62.8) 77.4,61.8 77.4,59.645 82.05,54.995 82.764,54.281 85.296,54.281 90.496,54.281 136.564,54.281 137.468,53.377 137.468,52.454 138.3,51.622 138.3,49.7 v1(139,49)
VCC: C20.1 C21.1 C22.1 C23.1 C24.1 C43.1 D1.2 J1.8 J2.8 J4.8 L1.1 P1.2 P2.1 R7.2 R11.2 R12.2 R13.2 R14.1 R27.1 R36.1 U1.24 U1.25 U1.32 U1.48 U1.60 U1.61 U1.66 U1.71 U2.4 U5.25 U6.25 U7.25 | length 531.8
  Top Layer w0.254: U7.25@69.825,63.3 73.5,63.3 75.4,61.4 R13.2@75.4,61 ; U6.25@103.025,63.3 107.6,63.3 109.1,61.8 R12.2@109.1,61 ; U5.25@136.325,63.3 141.9,63.3 143,62.2 R11.2@143,61 ; v1(156.4,45.75) 157.9,47.25 U1.60@158.45,47.25 ; U1.48@158.45,53.25 v1(160.875,53.25) ; U1.61@160.25,45.45 160.25,46.425 160.5,46.675 160.5,48.35 161.825,49.675 v1(162.725,49.675) 164.425,49.675 165.25,48.85 U1.71@165.25,45.45 ; U1.66@162.75,45.45 v1@162.75,49.65 ; U1.32@164.25,58.55 164.25,55.9 v1(164.617,55.533) 165.225,54.925 167.45,54.925 168.25,55.725 U1.24@168.25,58.55 U1.25@167.75,58.55
  Top Layer w0.5: D1.2@163.545,76.266 R7.2@168.557,76.266 ; R7.2@168.607,76.216 171.523,73.3 172.075,73.3 v1@172.25,73.125
  Top Layer w1: R14.1@48.54,43 R27.1@48.54,49 R36.1@48.54,55 ; 48.54,50.5 88.1,50.5 U2.4@89.25,49.35 ; R13.2@75.65,60.75 75.65,58.85 75.75,58.75 84.665,58.75 84.677,58.762 109.088,58.762 109.1,58.75 ; U2.4@89.25,50.5 U2.4@89.25,49.35 ; R12.2@109.1,61 109.1,58.75 ; R12.2@109.1,61 109.1,58.75 117.65,58.75 123.5,58.75 139.35,58.75 143,58.75 ; C20.1@109.75,50.5 90.4,50.5 U2.4@89.25,49.35 ; L1.1@119.839,52.117 119.839,50.839 119.5,50.5 109.5,50.5 109.7,50.7 109.7,58.75 109.1,58.75 ; 137.25,58.75 137.25,48.75 140.25,45.75 153.5,45.75 v1(156.4,45.75) ; R11.2@143,61 143,58.75 ; v1@156.838,65.737 155.737,65.737 148.75,58.75 143,58.75 ; v1(172.25,73.25) 173.75,74.75 183.75,74.75 ; P2.1@181,60.25 182.5,60.25 183.75,61.5 183.75,74.75 ; P1.2@181,81.29 182.21,81.29 183.75,79.75 183.75,74.75
  Bottom Layer w0.254: v1(160.875,53.25) v1@161.125,53.5
  Bottom Layer w0.5: C24.1@158.6,52.25 C24.1@158.6,52.95
  Bottom Layer w1: R36.1@48.52,55.02 48.52,106.495 48.52,111.52 53.5,116.5 53.5,119.5 56.3,122.3 60.515,122.3 136.95,122.3 138.285,120.965 J1.8@138.285,118.94 ; J4.8@63.285,118.94 63.285,122.265 ; J2.8@100.885,118.94 100.885,122.165 ; v1(156.4,45.75) 156.45,45.75 158.625,47.925 ; v1(156.775,65.675) 171.175,65.675 172.25,66.75 v1(172.25,73.25) ; 158.6,47.95 C24.1@158.6,52.25 ; 158.6,50.35 162.8,50.35 ; C24.1@158.6,52.95 158.6,53.25 v1(160.875,53.25) 162.4,53.25 v1@164.4,55.25 ; v1@162.8,49.75 162.8,50.35 ; v1(164.617,55.533) C22.1@164.625,58.65 ; C21.1@166.5,50.35 162.8,50.35
  other v1: 87.5,47.75 89.25,47.75 91,47.75 87.5,49.5 89.25,49.5 91,49.5 87.5,51.25 89.25,51.25 91,51.25
pads on no net: *2.4 *2.5 *2.15 *2.16 D1.3 J1.9 J2.9 J4.9 P1.6 U1.14 U1.19 U1.20 U1.23 U1.27 U1.28 U1.33 U1.34 U1.39 U1.40 U1.42 U1.55 U1.74 U5.5 U5.24 U5.34 U6.5 U6.24 U6.34 U7.5 U7.24 U7.34

## Polygon pours and split planes (outlines as drawn)
VCC on Top Layer "Bottom Layer-No Net" (solid, remove dead copper, pour order 1000): 86.5,45.9 86.4,45.9 81,40.5 48.5,40.5 48.5,58.5 48.75,58.75 76.8,58.75 137.2,58.75 137.25,58.7 137.25,54.9 119.922,54.9 119.839,54.817 119.872,54.85 120.7,54.85 120.7,49.9 120.5,50.1 96.4,50.1 96.3,50.1 92.1,45.9 86.5,45.9
NetC39_1 on Top Layer "Bottom Layer-No Net" (solid, remove dead copper, pour order 1001): 48.6,94.9 64,94.9 64,111.1 48.6,111.1
NetC40_1 on Top Layer "Bottom Layer-No Net" (solid, remove dead copper, pour order 1002): 83.4,94.9 83.4,111.1 64,111.1 64,95 83.3,95 83.4,94.9
+30 on Top Layer "Bottom Layer-No Net" (solid, remove dead copper, pour order 1003): 48.6,95 151.5,95 151.5,81.5 116.1,81.5 67.2,81.5 48.6,81.5
NetC33_1 on Top Layer "Bottom Layer-No Net" (solid, remove dead copper, pour order 1004): 83.4,95 83.4,111.1 100.4,111.1 100.4,100.4 100.4,95.1 100.3,95
NetC34_1 on Top Layer "Bottom Layer-No Net" (solid, remove dead copper, pour order 1005): 100.5,111.1 100.5,95 116.4,95 116.4,111.1
NetC28_1 on Top Layer "Bottom Layer-No Net" (solid, remove dead copper, pour order 1006): 133.2,94.9 151.5,94.9 151.5,111 133.3,111 133.2,110.9
NetC27_1 on Top Layer "Bottom Layer-No Net" (solid, remove dead copper, pour order 1007): 116.4,94.9 133.2,94.9 133.2,111.1 116.4,111.1
NetC30_1 on Top Layer "Bottom Layer-No Net" (solid, remove dead copper, pour order 1008): 151.5,81.5 151.5,64.2 136.3,64.2 136.3,81.5
NetC29_1 on Top Layer "Bottom Layer-No Net" (solid, remove dead copper, pour order 1009): 116.4,81.5 116.4,64.1 133.859,64.1 133.8,64.189 133.8,81.5 116.4,81.5
NetC36_1 on Top Layer "Bottom Layer-No Net" (solid, remove dead copper, pour order 1010): 116.4,81.4 116.4,63.9 102,63.9 101.87,64.1 101.87,81.4 116.4,81.4
NetC42_1 on Top Layer "Bottom Layer-No Net" (solid, remove dead copper, pour order 1011): 83.4,81.5 71.416,81.5 71.416,63.6 83.4,63.6
NetC35_1 on Top Layer "Bottom Layer-No Net" (solid, remove dead copper, pour order 1012): 83.4,67.8 83.4,81.5 96.8,81.5 96.8,67.8
NetC41_1 on Top Layer "Bottom Layer-No Net" (solid, remove dead copper, pour order 1013): 48.6,81.5 64.2,81.5 64.2,63.62 64.189,63.6 48.6,63.6
GND on Top Layer "Bottom Layer-No Net" (solid, remove dead copper, pour order 1014): 36.5,127 36.5,27 186.5,27 186.5,127
VCC on Bottom Layer "Bottom Layer-No Net" (solid, remove dead copper, pour order 1015): 48,40.5 48,59 77.5,59 77.506,59 82.606,53.9 120.3,53.9 120.3,48.6 120.2,48.5 119.8,48.9 96.8,48.9 96.4,48.9 92.5,45 85.4,45 85.4,44.7 81.1,40.4 81,40.5 48,40.5
+30 on Bottom Layer "Bottom Layer-No Net" (solid, remove dead copper, pour order 1016): 49.3,95 151.4,95 151.5,94.896 151.5,81.5 124.146,81.5 78.056,81.5 49.3,81.5
NetC39_1 on Bottom Layer "Bottom Layer-No Net" (solid, remove dead copper, pour order 1017): 48.52,94.9 48.62,95 64,95 64,111.2 63.7,110.9 48.52,110.9
NetC40_1 on Bottom Layer "Bottom Layer-No Net" (solid, remove dead copper, pour order 1018): 64.5,95 82,95 83.3,95 83.3,111.1 64.67,111.1 64.1,111.1 64.1,95.1 64,95
NetC33_1 on Bottom Layer "Bottom Layer-No Net" (solid, remove dead copper, pour order 1019): 83.3,95 83.3,111.1 100.2,111.1 100.2,95
NetC34_1 on Bottom Layer "Bottom Layer-No Net" (solid, remove dead copper, pour order 1020): 100.5,95 100.6,94.9 116.4,94.9 116.4,111 100.5,111
NetC27_1 on Bottom Layer "Bottom Layer-No Net" (solid, remove dead copper, pour order 1021): 116.4,94.9 116.4,111 133.1,111 133.1,94.9
NetC28_1 on Bottom Layer "Bottom Layer-No Net" (solid, remove dead copper, pour order 1022): 133.1,111 133.1,94.9 151.5,94.9 151.5,111
NetC30_1 on Bottom Layer "Bottom Layer-No Net" (solid, remove dead copper, pour order 1023): 151.5,64.3 151.5,81.5 137,81.5 137.131,81.291 137.131,64.3
NetC29_1 on Bottom Layer "Bottom Layer-No Net" (solid, remove dead copper, pour order 1024): 116.4,81.7 130.22,81.7 130.3,81.547 130.3,64.1 116.4,64.1
NetC36_1 on Bottom Layer "Bottom Layer-No Net" (solid, remove dead copper, pour order 1025): 116.4,64.1 116.4,81.742 105.702,81.742 105.674,81.8 105.6,81.645 105.6,64.1
NetC35_1 on Bottom Layer "Bottom Layer-No Net" (solid, remove dead copper, pour order 1026): 93.9,81.8 83.43,81.8 83.4,81.738 83.4,63.6 93.9,63.6
NetC42_1 on Bottom Layer "Bottom Layer-No Net" (solid, remove dead copper, pour order 1027): 83.4,81.7 83.4,63.6 71.4,63.6 71.4,68.287 71.4,76.032 71.4,81.534 83.272,81.534 83.4,81.7
NetC41_1 on Bottom Layer "Bottom Layer-No Net" (solid, remove dead copper, pour order 1028): 50.3,81.4 64.2,81.4 64.2,63.6 50.3,63.6
GND on Bottom Layer "Bottom Layer-No Net" (solid, remove dead copper, pour order 1029): 36.5,127 36.5,27 186.5,27 186.5,127

## Silkscreen, mask and mechanical layers (free items; w line width, h text height)
Top Overlay:
  lines w0.254: 33.992,28.524 34.5,27 ; 33.992,125.476 34.5,127 ; 34.246,27 34.754,27 ; 34.246,127 34.754,127 ; 34.5,71.261 34.5,27 ; 34.5,82.739 34.5,127 ; 35.008,28.524 34.5,27 ; 35.008,125.476 34.5,127 ; 36.5,24.746 36.5,25.254 ; 38.024,24.492 36.5,25 ; 38.024,25.508 36.5,25 ; 105.761,25 36.5,25 ; 114.425,23.725 120.45,23.725 ; 117.239,25 186.5,25 ; 184.976,24.492 186.5,25 ; 184.976,25.508 186.5,25 ; 186.5,24.746 186.5,25.254
  text "100 (mm)" at 35.414,71.515 h1.52 r90
  text "150 (mm)" at 106.015,24.086 h1.52
Mechanical 1:
  lines w0.254: 36.5,27 186.5,27 186.5,127 36.5,127 36.5,27

## Text inside footprints (layer, text, board x,y; h text height)
C1: Top Overlay "+" at 65.585,50.931 h1.5 r90
C7: Top Overlay "+" at 95.45,47 h1.5
C20: Top Overlay "+" at 109,52.55 h1.5 r270
Cool: Bottom Overlay "100 (mm)" at 107.326,167.002 h1.52 r180; Bottom Overlay "50 (mm)" at 113.733,170.918 h1.52 r90; Bottom Overlay "25 (mm)" at 118.483,158.418 h1.52 r90; Bottom Overlay "5.25 (mm)" at 116.476,149.963 h1.52 r90; Bottom Overlay "5.25 (mm)" at 116.468,194.713 h1.52 r90; Bottom Overlay "5.25 (mm)" at 78.968,194.713 h1.52 r90; Bottom Overlay "5.25 (mm)" at 78.976,149.963 h1.52 r90; Bottom Overlay "25 (mm)" at 80.983,158.418 h1.52 r90; Bottom Overlay "50 (mm)" at 76.233,170.918 h1.52 r90; Bottom Overlay "5.25 (mm)" at 153.968,194.713 h1.52 r90; Bottom Overlay "5.25 (mm)" at 153.976,149.963 h1.52 r90; Bottom Overlay "25 (mm)" at 155.983,158.418 h1.52 r90; Bottom Overlay "50 (mm)" at 151.233,170.918 h1.52 r90; Bottom Overlay "50 (mm)" at 82.961,167.002 h1.52 r180
J1: Top Overlay "1" at 131.11,112.645 h1.5; Top Overlay "5" at 141.94,112.645 h1.5; Top Overlay "9" at 140.555,122.045 h1.5; Top Overlay "6" at 132.245,122.045 h1.5
J2: Top Overlay "1" at 93.71,112.645 h1.5; Top Overlay "5" at 104.54,112.645 h1.5; Top Overlay "9" at 103.155,122.045 h1.5; Top Overlay "6" at 94.845,122.045 h1.5
J4: Top Overlay "1" at 56.11,112.645 h1.5; Top Overlay "5" at 66.94,112.645 h1.5; Top Overlay "9" at 65.555,122.045 h1.5; Top Overlay "6" at 57.245,122.045 h1.5
U3: Top Overlay "3" at 86.46,38.575 h1.5 r180; Top Overlay "1" at 91.29,38.575 h1.5 r180; Top Overlay "2" at 89,38.575 h1.5 r180